# EAGLE board EncoderTBPCB (EAGLE 7.7.0)
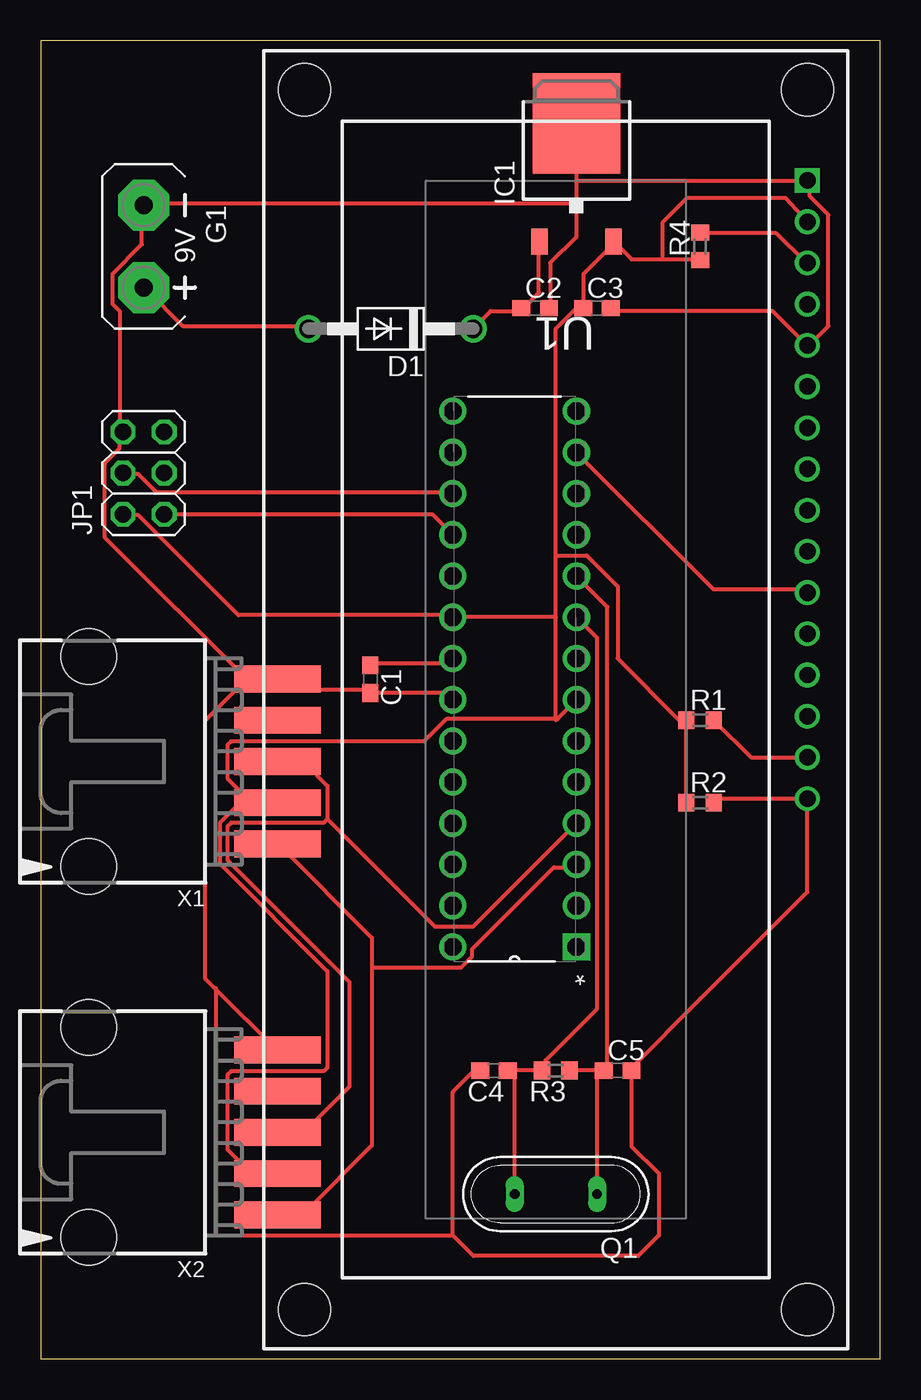
[diagram p0: board, top side]
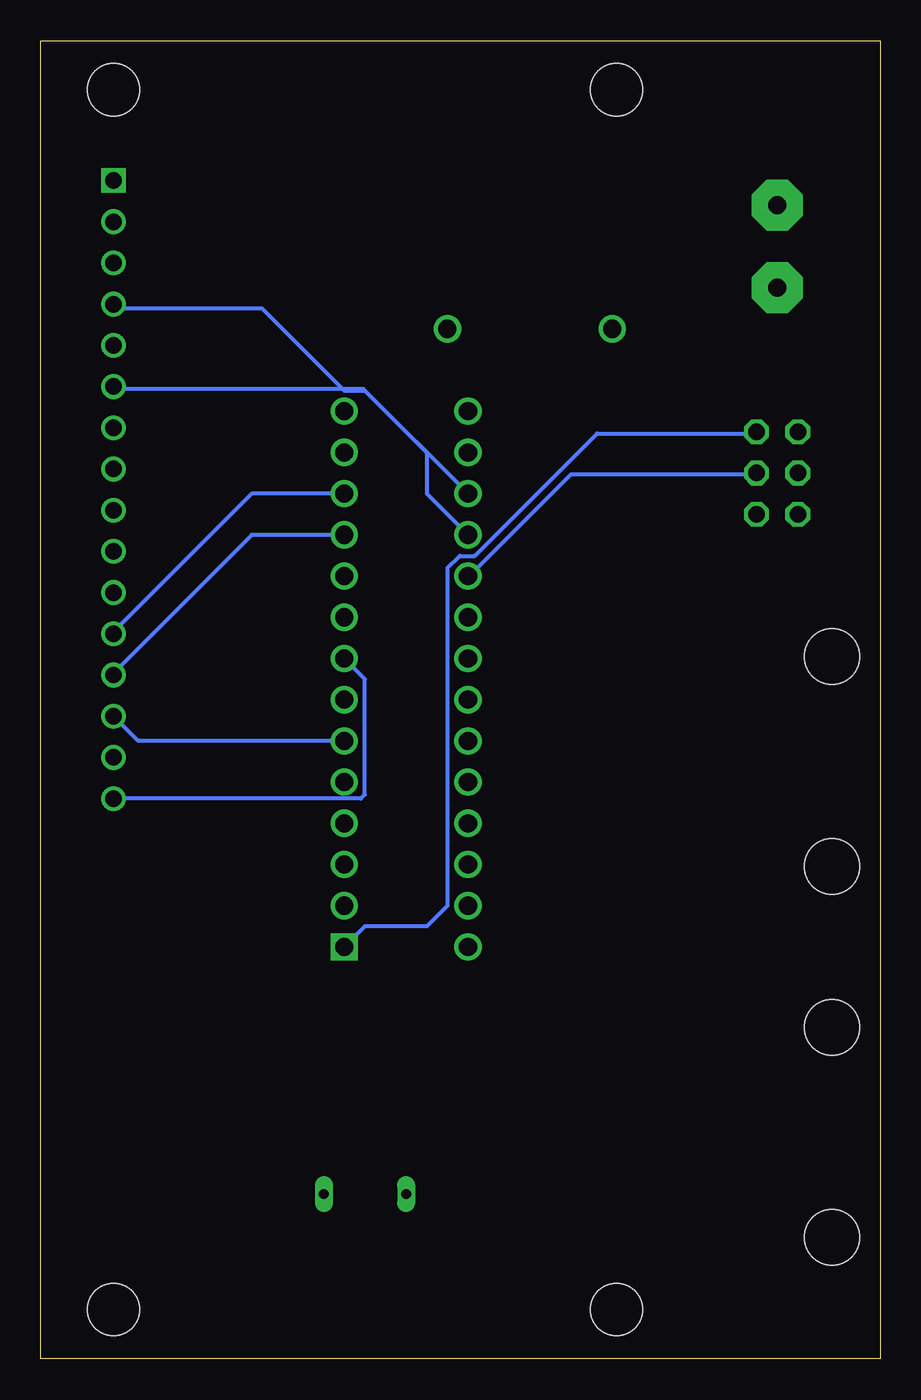
[diagram p1: board, bottom side, seen from below]

Size 51.74 x 81.27 mm. Coordinates in mm from the lower left corner, seen from the top.
Outline: 0,0 51.74,0 51.74,81.27 0,81.27 0,0
Copper layers (1*16): Top 0.035mm / dielectric 1.5mm / Bottom 0.035mm
Design rules "default": minimum track width 10mil, minimum drill 24mil, track to track 8mil, track to pad 8mil, pad to pad 8mil, via to via 8mil, smd to smd 8mil, copper to edge 40mil, drill to drill 8mil, minimum pad ring 10mil, minimum via ring 8mil, stop-mask expansion 4mil, vias tented up to drill 0mil, thermal gap 10mil

## Footprints (pad centres in the part's own frame; a part is rotated, then mirrored left to right if it is on the bottom)
C0603 = smd 1.1 x 1: 1 -0.85,0; 2 0.85,0
DO41-10 = drill 1.118: A 5.08,0; C -5.08,0
AB9V = drill 1.118 pad 3.15 octagon: + 0,2.54; - 0,-2.54
TO252 = smd 1 x 1.6: 1 -2.28,-4.8; 2 2.28,-4.8 | smd 5.4 x 6.2: 3 0,2.5
2X03 = drill 1.016 octagon: 1 -2.54,-1.27; 2 -2.54,1.27; 3 0,-1.27; 4 0,1.27; 5 2.54,-1.27; 6 2.54,1.27
QS = drill 0.61 long: 1 -2.54,0; 2 2.54,0
R0603 = smd 1 x 1.1: 1 -0.85,0; 2 0.85,0
DIP254P762X457-28 = drill 1.118 square: 1 -7.62,33.02 | drill 1.118: 2 -7.62,30.48; 3 -7.62,27.94; 4 -7.62,25.4; 5 -7.62,22.86; 6 -7.62,20.32; 7 -7.62,17.78; 8 -7.62,15.24; 9 -7.62,12.7; 10 -7.62,10.16; 11 -7.62,7.62; 12 -7.62,5.08; 13 -7.62,2.54; 14 -7.62,0; 15 0,0; 16 0,2.54; 17 0,5.08; 18 0,7.62; 19 0,10.16; 20 0,12.7; 21 0,15.24; 22 0,17.78; 23 0,20.32; 24 0,22.86; 25 0,25.4; 26 0,27.94; 27 0,30.48; 28 0,33.02
LCD-16X2-4HOLES = drill 1.016 square: 1 -32,15.5 | drill 1.016: 2 -29.46,15.5; 3 -26.92,15.5; 4 -24.38,15.5; 5 -21.84,15.5; 6 -19.3,15.5; 7 -16.76,15.5; 8 -14.22,15.5; 9 -11.68,15.5; 10 -9.14,15.5; 11 -6.6,15.5; 12 -4.06,15.5; 13 -1.52,15.5; 14 1.02,15.5; 15 3.56,15.5; 16 6.1,15.5 | hole 3.2: -37.6,15.5; -37.6,-15.5; 37.6,-15.5; 37.6,15.5
15-91-05 = smd 1.651 x 5.334: 1 -5.08,-10.795; 2 -2.54,-10.795; 3 0,-10.795; 4 2.54,-10.795; 5 5.08,-10.795 | hole 3.404: -6.477,0.838; 6.477,0.838

## Placement (x,y rotation side)
C1  100nF  [C0603]  20.32,41.91 270 top
C2  100nF  [C0603]  30.48,64.77 0 top
C3  100nF  [C0603]  34.29,64.77 0 top
C4  22pF  [C0603]  27.94,17.78 180 top
C5  22pF  [C0603]  35.56,17.78 0 top
D1  1N4004  [DO41-10]  21.59,63.5 180 top
G1  AB9V  [AB9V]  6.35,68.58 180 top
IC1  7805DT  [TO252]  33.02,73.66 0 top
JP1  [2X03]  6.35,54.61 90 top
Q1  [QS]  31.75,10.16 180 top
R1  220Ω  [R0603]  40.64,39.37 0 top
R2  200Ω  [R0603]  40.64,34.29 0 top
R3  1MΩ  [R0603]  31.75,17.78 180 top
R4  850Ω  [R0603]  40.64,68.58 90 top
U1  ATMEGA328P-PU  [DIP254P762X457-28]  25.4,58.42 180 top
U$1  LCD-HD447804-HOLES16X2-4-HOLES  [LCD-16X2-4HOLES]  31.75,40.64 270 top
X1  C-GRID-05-15-91  [15-91-05]  3.81,36.83 90 top
X2  C-GRID-05-15-91  [15-91-05]  3.81,13.97 90 top

## Library data of the parts
C1-C5 R1-R4 = resistor
D1 = diode
G1 = battery
IC1 = linear
JP1 = pinhead
Q1 = special
U1 = Atmel_By_element14_Batch_1-00; MPN: ATMEGA328P-PU; OC_FARNELL: 1715487; OC_NEWARK: 15R0268; PACKAGE: PDIP-28; SUPPLIER: Atmel
U$1 = HD44780LCD
X1 X2 = con-molex

## Nets
N$1: JP1.4 U1.17 U$1.6
N$2: R1.2 U$1.15
N$4: U1.6 U$1.14
N$5: U1.11 U$1.13
N$6: U1.12 U$1.12
N$7: U1.13 U$1.11
N$9: JP1.1 U1.18 U$1.4
N$10: C4.1 Q1.2 R3.2 U1.9
N$11: C5.1 Q1.1 R3.1 U1.10
N$12: C1.1 U1.21
N$13: U1.3 X1.1 X2.1
N$14: U1.4 X1.3 X2.3
N$15: D1.A G1.+
N$16: C2.1 D1.C IC1.1
N$18: JP1.3 U1.19
N$19: JP1.5 U1.1
VDD: C3.1 IC1.2 JP1.2 R1.1 R2.1 R4.1 U1.7 U1.20 U$1.2 X1.2 X2.2
VO: R4.2 U$1.3
VSS: C1.2 C2.2 C3.2 C4.2 C5.2 G1.- IC1.3 JP1.6 R2.2 U1.8 U1.22 U$1.1 U$1.5 U$1.16 X1.5 X2.5

## Tracks (layer width: path | path; a pad name or v marks a point on that pad's centre or on a via)
N$1
  Top 0.254: JP1.4 5.1,54.53 6.02,54.53 7.16,53.39 25.22,53.39 U1.17
  Bottom 0.254: U1.17 31.85,59.79 47.17,59.79 U$1.6
N$2
  Top 0.254: R1.2 43.78,37.08 U$1.15
N$4
  Bottom 0.254: U1.6 45.72,38.1 46.99,39.37 U$1.14
N$5
  Bottom 0.254: U1.11 38.73,50.8 46.99,42.55 U$1.13
N$6
  Top 0.254: 47.17,44.48 U$1.12
  Bottom 0.254: U1.12 38.73,53.34 46.99,45.09 U$1.12
N$7
  Top 0.254: 47.17,47.22 U$1.11 47.17,47.45 41.45,47.45 U1.13
N$9
  Top 0.254: JP1.1 24.13,52.07 U1.18
  Bottom 0.254: 25.22,50.88 U1.18 27.94,53.34 27.94,55.88 31.75,59.69 33.02,59.69 38.1,64.77 47,64.77 U$1.4
N$10
  Top 0.254: 29.21,17.78 R3.2 31.11,17.78 31.11,18.41 34.29,21.59 34.29,44.45 U1.9 | Q1.2 29.21,17.78 | 29.21,17.78 C4.1
N$11
  Top 0.254: 34.29,17.78 R3.1 | Q1.1 34.29,17.78 | 34.29,17.78 C5.1 34.92,17.78 34.92,46.36 U1.10
  Bottom 0.254: 34.14,10.18 Q1.1
N$12
  Top 0.254: C1.1 20.42,42.88 24.99,42.88 25.22,43.1 U1.21
N$13
  Top 0.254: 20.42,24.13 20.42,25.96 14.71,31.67 X1.1 | 20.42,24.13 20.42,13.16 16.31,9.04 14.71,9.04 X2.1 | 20.42,24.13 25.91,24.13 26.59,24.82 26.59,25.27 31.62,30.3 33,30.3 U1.3
N$14
  Top 0.254: U1.4 26.67,26.67 26.59,26.64 24.31,26.64 17.68,33.27 | 17.68,33.27 17.45,33.05 11.73,33.05 11.51,32.82 11.51,30.76 19.05,23.22 19.05,16.82 16.31,14.07 14.71,14.07 X2.3 | 17.68,33.27 17.68,35.33 16.31,36.7 14.71,36.7 X1.3
N$15
  Top 0.254: D1.A 16.31,63.68 8.76,63.68 6.48,65.96 G1.+
N$16
  Top 0.254: D1.C 26.82,63.68 27.74,64.59 29.57,64.59 C2.1 29.79,64.82 30.71,65.73 30.71,68.71 IC1.1
N$18
  Bottom 0.254: JP1.3 7.62,54.53 19.05,54.53 25.22,48.36 U1.19
N$19
  Bottom 0.254: U1.1 31.75,26.67 27.94,26.67 26.67,27.94 26.67,48.74 25.91,49.51 24.99,49.51 17.45,57.05 7.62,57.05 JP1.5
VDD
  Top 0.254: 38.35,67.79 36.42,67.79 35.51,68.71 IC1.2 35.28,68.71 33.45,66.88 33.45,64.82 C3.1 33.02,64.77 31.75,63.5 31.75,49.53 | 38.35,67.79 40.54,67.79 R4.1 | 38.35,67.79 38.35,70.08 39.85,71.58 45.9,71.58 U$1.2 | 25.45,45.85 U1.20 | JP1.2 5.1,52.02 6.02,52.02 12.19,45.85 25.22,45.85 U1.20 | 12.19,34.19 11.05,33.05 11.05,30.53 17.68,23.9 17.68,17.96 17.45,17.73 11.73,17.73 11.51,17.5 11.51,12.93 12.88,11.56 14.48,11.56 X2.2 | 12.19,34.19 14.48,34.19 X1.2 12.19,34.19 | 12.19,34.19 12.19,35.1 11.51,35.79 11.51,37.85 11.73,38.08 23.62,38.08 24.99,39.45 31.75,39.45 | 31.75,39.45 31.85,39.45 33,40.59 U1.7 | 31.75,49.53 33.66,49.53 35.56,47.62 35.56,43.18 39.37,39.37 R1.1 R2.1 | 31.75,39.45 31.75,45.72 | 31.75,45.72 31.75,49.53 | 31.75,39.37 31.75,39.45 | 31.75,45.72 U1.20
VO
  Top 0.254: R4.2 40.77,69.39 45.34,69.39 47.17,67.56 U$1.3
VSS
  Top 0.254: 33,72.59 33,76.02 IC1.3 | 33,72.59 33,71.22 | 33,71.22 33,69.16 31.39,67.56 31.39,64.82 C2.2 | C3.2 35.28,64.59 45.11,64.59 47.17,62.54 U$1.5 47.4,62.54 48.54,63.68 48.54,70.54 47.4,71.68 47.4,72.59 U$1.1 47.17,72.59 33,72.59 | 27.05,17.73 C4.2 26.72,17.78 25.4,16.46 25.4,7.62 | 33,71.22 6.48,71.22 G1.- 6.25,70.99 6.25,68.71 4.42,66.88 4.42,65.05 4.88,64.59 4.88,57.28 JP1.6 4.88,57.05 4.88,56.13 3.96,55.22 3.96,50.65 12.88,41.73 | 25.4,7.62 26.67,6.35 36.83,6.35 38.1,7.62 38.1,11.43 36.41,13.12 C5.2 36.42,17.96 40.66,22.2 | U1.22 24.99,41.05 20.42,41.05 C1.2 20.19,41.28 15.16,41.28 14.71,41.73 X1.5 | 40.66,22.2 47.25,28.78 U$1.16 41.74,34.54 R2.2 | 40.64,22.22 40.66,22.2 | 12.88,41.73 14.48,41.73 X1.5 | X2.5 14.48,19.1 10.76,22.82 | 12.88,41.73 X1.5 | 10.76,22.82 10.16,23.42 10.16,39.37 12.52,41.73 12.88,41.73 | 25.4,7.62 10.8,7.62 10.8,22.86 10.76,22.82
  Bottom 0.254: U1.8 31.75,41.91 31.75,34.79 32,34.54 U$1.16